# Altium PCB USER_SW_Breakout.pcbdoc (part 1 of 5)
Units mm, origin at the board's own origin, x right, y up, seen from the top; angles counter-clockwise.
Board outline 125 x 23.5 mm, 2 copper layers (Top Layer, Bottom Layer), stack 0.533 mm thick; 24 components, 16 nets, 4985 pads, 3 vias.
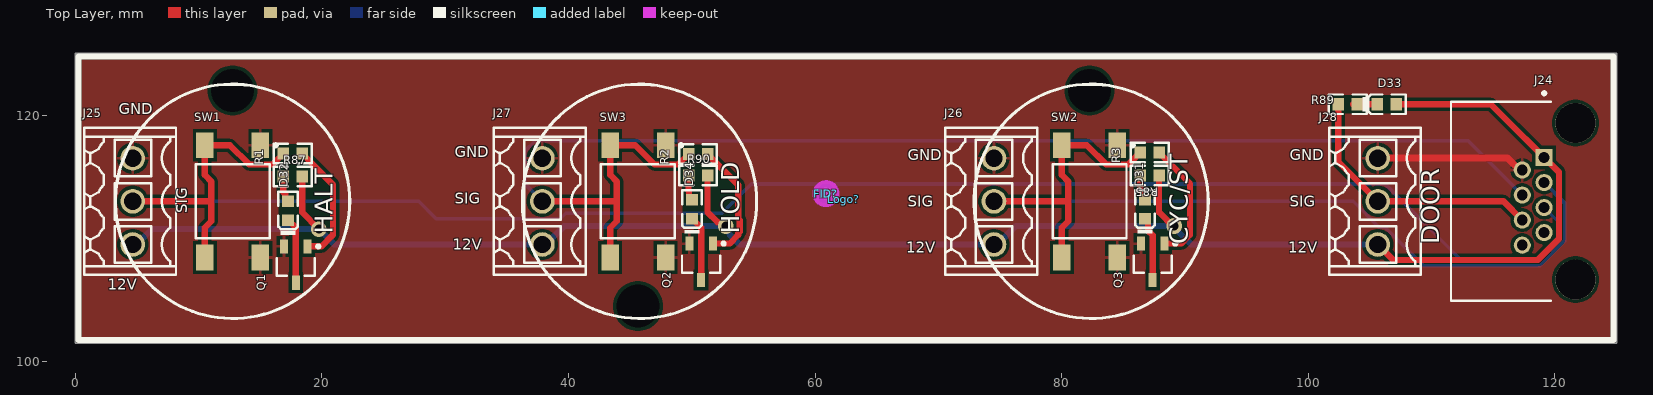
[diagram p0: Top Layer view]
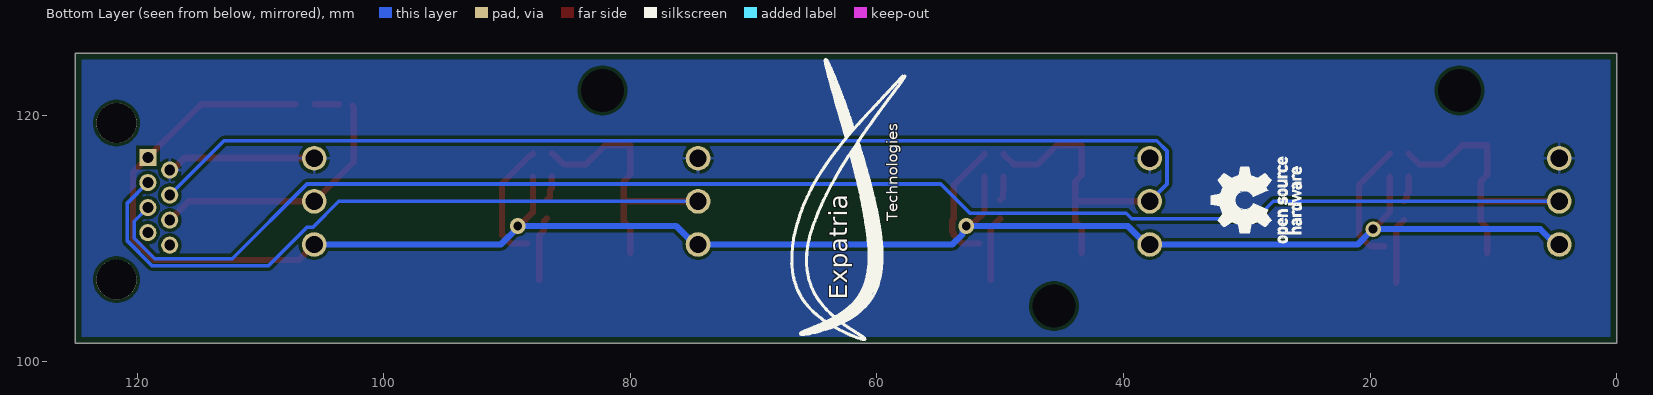
[diagram p1: Bottom Layer view, seen from below]
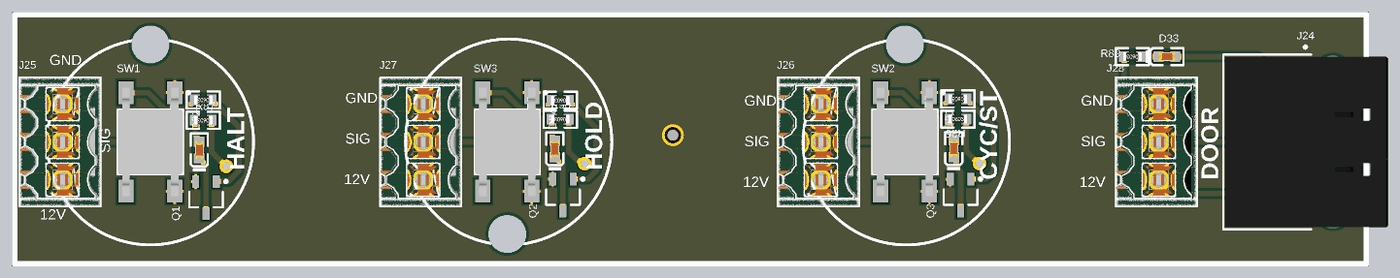
[diagram p6: 3D render of the assembled board from above, using the file's embedded part models]

## Layer stack, top to bottom
Top Solder: solder mask 0.0102, Solder Resist, Dk 3.5
Top Layer: signal copper 0.0356
Dielectric 3: prepreg 0.0711, PP-006, Dk 4.1
Dielectric1: dielectric 0.32, FR-4, Dk 4.8
Dielectric 4: prepreg 0.0711, PP-006, Dk 4.1
Bottom Layer: signal copper 0.0356
Bottom Solder: solder mask 0.0102, Solder Resist, Dk 3.5

## Board outline
0,101.5 0,125 125,125 125,101.5

## Design rules (kind name [scope] priority, off if disabled: settings)
BoardOutlineClearance [OnLayer('Top Layer')] p1: gap=0.508 ignorepadtopadclearanceinfootprint=FALSE
BoardOutlineClearance BoardOutlineClearance_3 [OnLayer('GND')] p2: gap=0.508 ignorepadtopadclearanceinfootprint=FALSE
BoardOutlineClearance BoardOutlineClearance_2 [OnLayer('PWR')] p3: gap=0.508 ignorepadtopadclearanceinfootprint=FALSE
BoardOutlineClearance BoardOutlineClearance_1 [OnLayer('Bottom Layer')] p4: gap=0.508 ignorepadtopadclearanceinfootprint=FALSE
Clearance [All] p1: gap=0.254 ignorepadtopadclearanceinfootprint=TRUE except(0: SMDPad-Hole Fill-Hole Poly-Hole Region-Hole Text-Hole; 0.203: Via-Fill Via-Poly Via-Region; 0.305: SMDPad-Via THPad-Via; 0.5: THPad-Hole Via-Hole; 0.508: SMDPad-SMDPad SMDPad-THPad THPad-THPad)
Clearance "Pad Clearance" [IsPad vs IsPad] p2: gap=0.254 ignorepadtopadclearanceinfootprint=TRUE except(0: Arc-Hole Track-Hole SMDPad-Hole THPad-Hole Via-Hole Fill-Hole Poly-Hole Region-Hole Text-Hole; 0.203: Arc-Arc Arc-Track Arc-Fill Arc-Poly Arc-Region Track-Track Track-Fill Track-Poly Track-Region SMDPad-Fill SMDPad-Poly SMDPad-Region THPad-Fill THPad-Poly THPad-Region Via-Fill Via-Poly Via-Region; 0.305: SMDPad-Via THPad-Via; 0.508: SMDPad-SMDPad SMDPad-THPad THPad-THPad)
DiffPairsRouting [All] p1: maxlimit=0.254 minlimit=0.203 mostfreqgap=0.203 toplayer_minwidth=0.152 toplayer_maxwidth=0.381 toplayer_prefwidth=0.254 bottomlayer_minwidth=0.152 bottomlayer_maxwidth=0.381 bottomlayer_prefwidth=0.254 maxuncoupledlength=12.7
HoleSize [All] p1: absolutevalues=TRUE maxlimit=5.08 minlimit=0.025 maxpercent=80.000 minpercent=20.000
MinimumAnnularRing [All] p1: minimumring=0.16
MinimumSolderMaskSliver [All] p1: minsoldermaskwidth=0.127
PolygonConnect [All] p1: connectstyle=Relief reliefconductorwidth=0.254 reliefentries=4 polygonreliefangle="90 Angle" airgapwidth=0.254
RoutingVias [All] p1: holewidth=0.711 width=1.27 viastyle="Through Hole" minholewidth=0.711 minwidth=1.27 maxholewidth=0.711 maxwidth=1.27 useviatemplates=TRUE viatemplateguid#1={29321985-CF2A-4769-A0B6-67998678A9C6} viatemplatename#1=v70h35m0mx0
SilkToSolderMaskClearance SilkscreenOverComponentPads [IsPad] p1: minsilkscreentomaskgap=0.254 clearancetoexposedcopper=TRUE
SolderMaskExpansion [All] p1: expansion=0.102 istentingtop=FALSE
ViasUnderSMD [All] p1: allowed=FALSE
Width [All] p1: maxlimit=5.08 minlimit=0.254 preferedwidth=0.254 minimp=50.000000 maximp=50.000000 favimp=50.000000
26 further rules are at their usual default settings.

## Components (designator, comment, footprint, x,y, rotation, side; value= is the part's Value field where it differs from the comment)
D31 "0603 Green" 0603_LED_S1 86.75,112.375 r90 top
D32 "0603 Red" 0603_LED_S1 17.25,112.25 r90 top
D33 "0603 Yellow" 0603_LED_S1 106.375,120.875 r0 top
D34 "0603 Yellow" 0603_LED_S1 50,112.35 r90 top
FID? "Fiducial" Fiducial10-20 60.875,113.625 r0 top
J24 "RJHSE-5080" FP-RJHSE-5080-MFG 119.252,113 r90 top
J25 "WJ15EDGVC-3.5-3P" SL_3_50_180G_03 4.435,113 r90 top
J26 "WJ15EDGVC-3.5-3P" SL_3_50_180G_03 74.28,113 r90 top
J27 "WJ15EDGVC-3.5-3P" SL_3_50_180G_03 37.655,113 r90 top
J28 "WJ15EDGVC-3.5-3P" SL_3_50_180G_03 105.405,113 r90 top
Logo? "Expatria Technologies" Expatria-Logo 1168.727,1240.962 r90 top value="Expatria Logo"
Q1 "AO3400A N" SOT-23-3L 17.875,107.875 r90 top
Q2 "AO3400A N" SOT-23-3L 50.75,108.1 r90 top
Q3 "AO3400A N" SOT-23-3L 87.375,108.1 r90 top
R1 "2KΩ ±1%" 0603_R 17.625,116.875 r180 top
R2 "2KΩ ±1%" 0603_R 50.5,116.85 r180 top
R3 "2KΩ ±1%" 0603_R 87.125,116.975 r180 top
R85 "2KΩ ±1%" 0603_R 87.125,115.104 r0 top
R87 "2KΩ ±1%" 0603_R 17.625,115 r180 top
R89 "2KΩ ±1%" 0603_R 103.2,120.875 r180 top
R90 "2KΩ ±1%" 0603_R 50.5,115.1 r180 top
SW1 "K2-1102SP-C4SC-04" TECO-FSM4JSMATR_V 12.75,113 r0 top
SW2 "K2-1102SP-C4SC-04" TECO-FSM4JSMATR_V 82.25,113 r0 top
SW3 "K2-1102SP-C4SC-04" TECO-FSM4JSMATR_V 45.625,113 r0 top

## Footprints (in the part's own frame and the unit in brackets; to place one, negate y for a bottom-side part, rotate by r counter-clockwise, add the part's x,y. Pads: shape width x height; smd on the part's side, far side on the other; paste and mask are expansions set on the pad)
0603_LED_S1 [mm]
  rect 0.93x0.98 smd: A(0.77,0) K(-0.77,0)
  silkscreen extent -1.98,-0.79 1.54,0.79, body extent -0.8,-0.4 0.8,0.4, height 0.6
0603_R [mm]
  rect 0.93x0.98 smd: 1(-0.77,0) 2(0.77,0)
  silkscreen extent -1.53,-0.79 1.54,0.79, body extent -0.85,-0.4 0.85,0.4, height 0.56
Expatria-Logo [mil] "Expatria DXF logo"